# Altium PCB PCB.PcbDoc
Units mm, origin at the board's own origin, x right, y up, seen from the top; angles counter-clockwise.
Board outline 30 x 85 mm, 2 copper layers (Top Layer, Bottom Layer); 18 components, 18 nets, 88 pads, 0 vias.
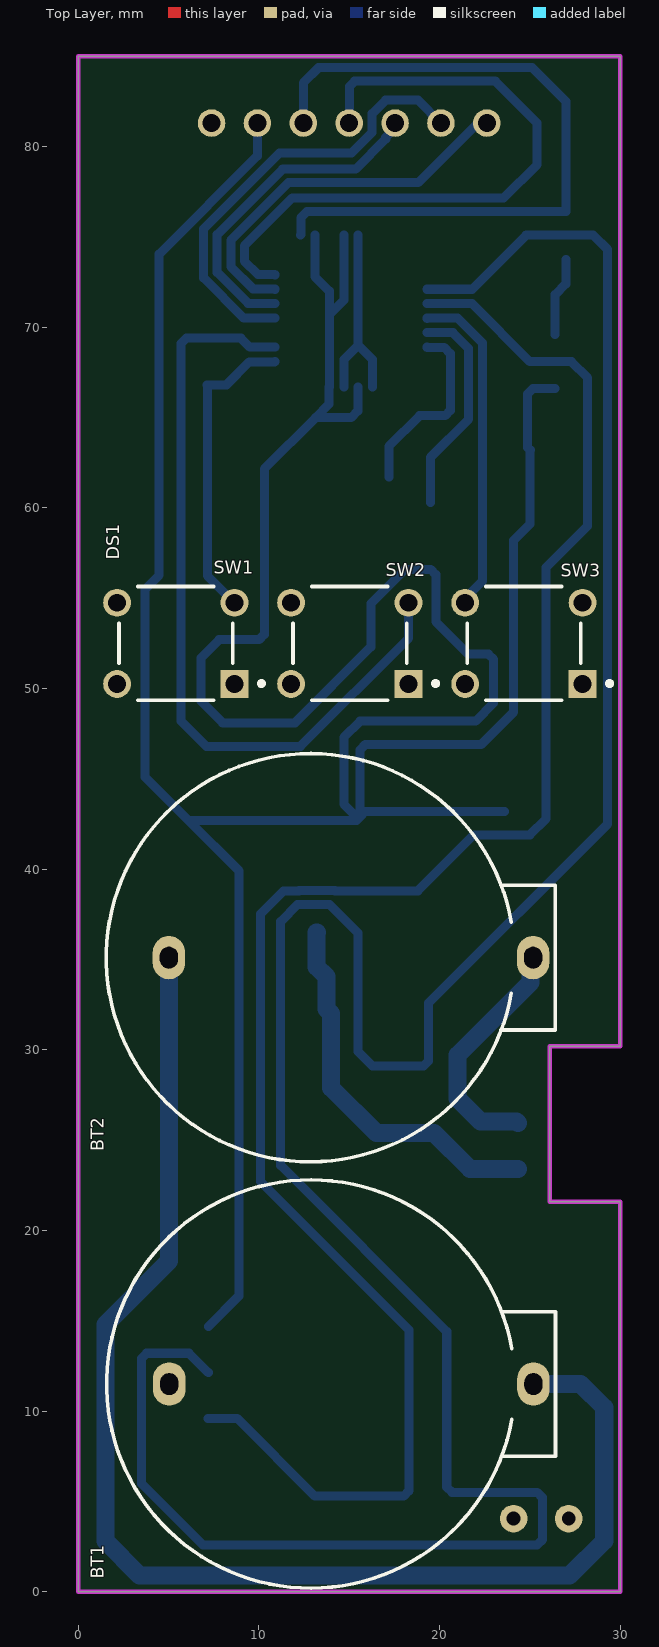
[diagram p0: Top Layer view]
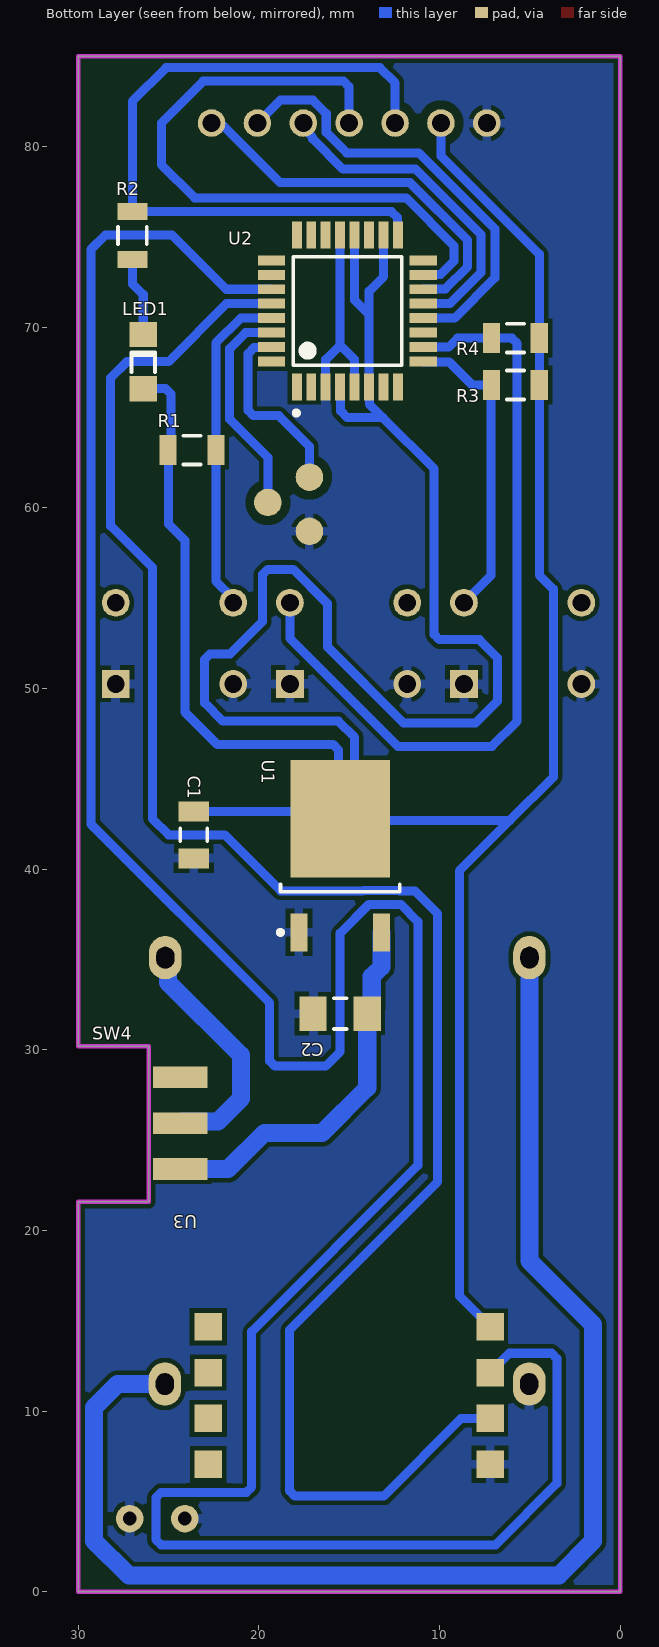
[diagram p1: Bottom Layer view, seen from below]
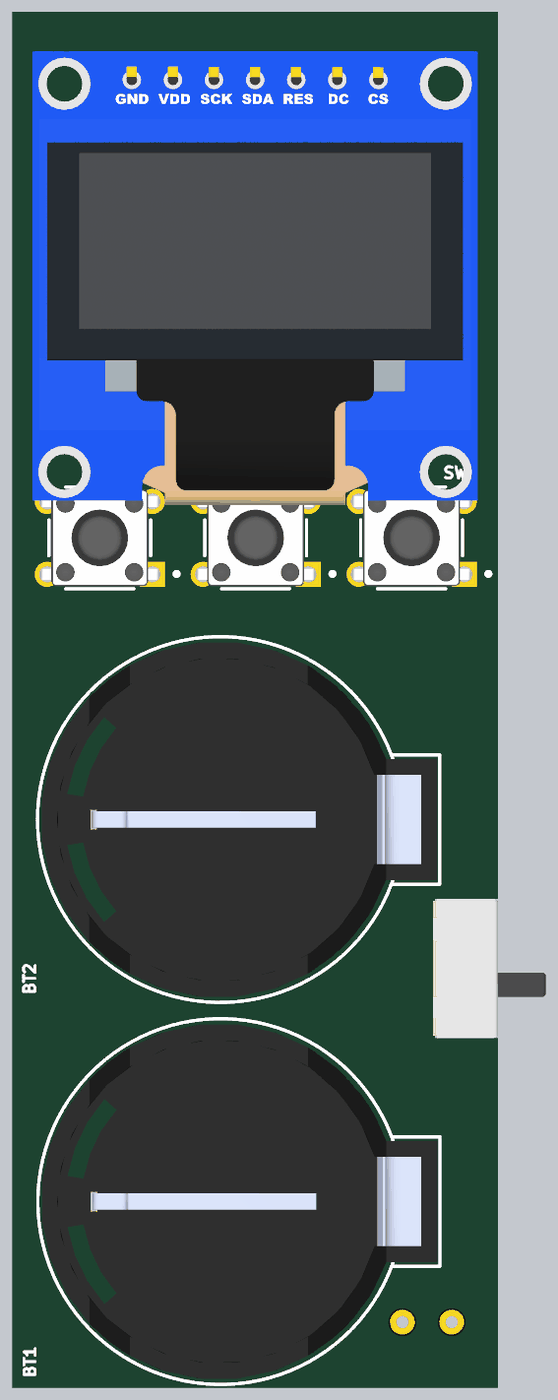
[diagram p2: 3D render of the assembled board from above, using the file's embedded part models]
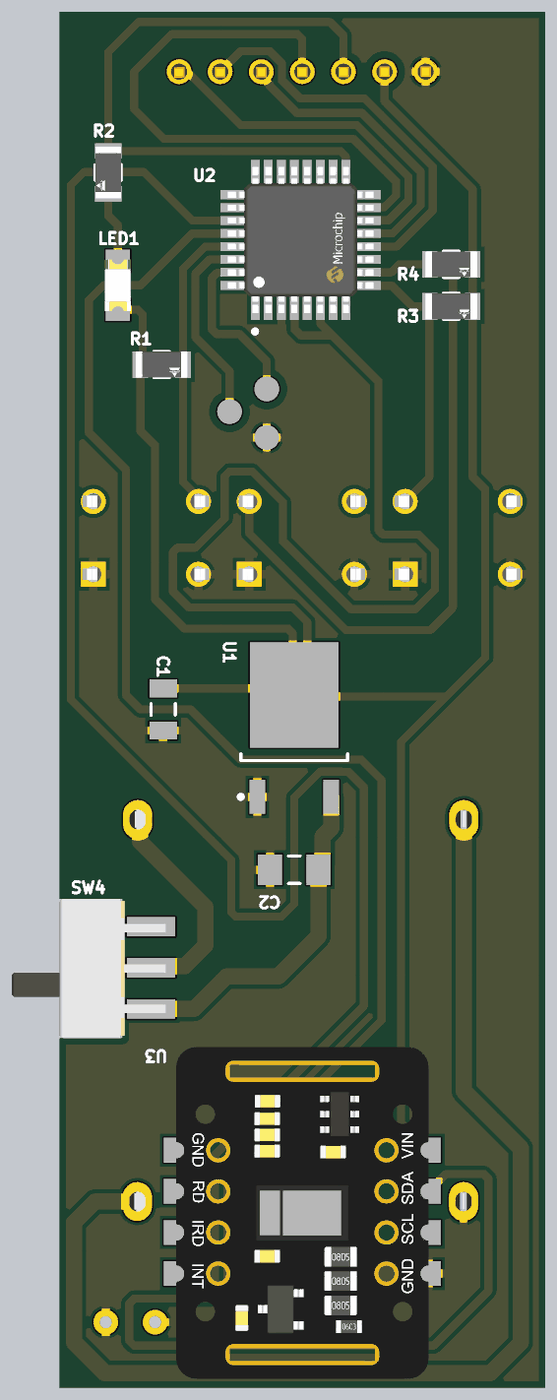
[diagram p3: 3D render of the assembled board from below, using the file's embedded part models]

## Layer stack, top to bottom
Top Solder: solder mask 0.0102, Solder Resist, Dk 3.5
Top Layer: signal copper 0.0356
Dielectric 1: dielectric 0.32, FR-4, Dk 4.8
Bottom Layer: signal copper 0.0356
Bottom Solder: solder mask 0.0102, Solder Resist, Dk 3.5

## Board outline
0,0 0,85 30,85 30,30.2 26.1,30.2 26.1,21.6 30,21.6 30,0

## Design rules (kind name [scope] priority, off if disabled: settings)
Clearance "Increased Clearance" [InPadClass('Increased Clearance')] p1: gap=0.5 ignorepadtopadclearanceinfootprint=TRUE
Clearance [All] p2: gap=0.254 ignorepadtopadclearanceinfootprint=TRUE except(0: Arc-Hole Track-Hole SMDPad-Hole THPad-Hole Via-Hole Fill-Hole Poly-Hole Region-Hole Text-Hole)
PolygonConnect [All] p1: connectstyle=Relief reliefconductorwidth=0.5 reliefentries=4 polygonreliefangle="90 Angle" airgapwidth=0.254
RoutingVias [All] p1: holewidth=0.711 width=1.27 viastyle="Through Hole" minholewidth=0.711 minwidth=1.27 maxholewidth=0.711 maxwidth=1.27
SolderMaskExpansion [All] p1: expansion=0.102 istentingtop=FALSE
Width [All] p1: maxlimit=1 minlimit=0.254 preferedwidth=0.254 minimp=50.000000 maximp=50.000000 favimp=50.000000
30 further rules are at their usual default settings.

## Classes and differential pairs
pad class "Increased Clearance": DS1-2 DS1-3
component class Schemat: BT1 BT2 C1 C2 DS1 LED1 R1 R2 R3 R4 SW1 SW2 SW3 SW4 U1 U2 U3

## Components (designator, comment, footprint, x,y, rotation, side; value= is the part's Value field where it differs from the comment)
BT1 "BAT3volt" BTH2032 12.82,11.5 r180 top locked
BT2 "BAT3volt" BTH2032 12.8,35.1 r180 top locked
C1 "10u" CAPC3216X180X50LL20T25 23.6,41.9 r90 bottom
C2 "100n" CAPC3216X94X50ML20T25 15.5,32 r180 bottom
DS1 "0.96\"_OLED_SPI" "0.96\"_OLED_SPI" 15,81.3 r0 top locked
LED1 "150120BS75000" 1206_A 26.4,68.1 r270 bottom
R1 "10k" FP-CRCW1206-e3-IPC_C 23.7,63.2 r180 bottom
R2 "1.5k" FP-CRCW1206-e3-IPC_C 27,75.074 r270 bottom
R3 "2.7k" FP-CRCW1206-e3-IPC_C 5.8,66.8 r180 bottom
R4 "2.7k" FP-CRCW1206-e3-IPC_C 5.8,69.4 r180 bottom
SW1 "3-1825910-1" FP-3-1825910-1-MFG 5.4,52.5 r180 top locked
SW2 "3-1825910-1" FP-3-1825910-1-MFG 15.035,52.5 r180 top locked
SW3 "3-1825910-1" FP-3-1825910-1-MFG 24.669,52.5 r180 top locked
SW4 "SS12D00_SELECTOR" SS12D00_SELECTOR 28.1,25.9 r0 bottom locked
U1 "LD1117DT33CTR" TO-252_N 15.5,40.75 r90 bottom
U2 "ATmega328P-AU" FP-32A-MFG 15.1,70.9 r90 bottom
U3 "MAX30102_MODULE" MAX30102_MODULE 15,10.8 r180 bottom locked
? "Comment" JUMPER 25.625,4.05 r0 top

## Footprints (in the part's own frame and the unit in brackets; to place one, negate y for a bottom-side part, rotate by r counter-clockwise, add the part's x,y. Pads: shape width x height; smd on the part's side, far side on the other; paste and mask are expansions set on the pad)
"0.96\"_OLED_SPI" [mil]
  round 60 hole 39.37: 1(-300,0) 2(-200,0) 3(-100,0) 4(0,0) 5(100,0) 6(200,0) 7(300,0)
  body extent -542,-1054 542,50, height 327
1206_A [mm] "Chip LED, 2-Leads, Body 3.2x1.6mm, IPC Medium Density"
  rect 1.4x1.5 smd: 1(-1.5,0) 2(1.5,0)
  silkscreen extent -0.5,-0.67 0.6,0.65, body extent -1.6,-0.8 1.6,0.8, height 0.68
BTH2032 [mm] "CR2032 BATTERY HOLDER"
  oval 1.8x2.4 hole 1 slot 1.2 at 90 deg: 1(-12.38,0) 2(7.78,0)
  silkscreen extent -13.6,-11.3 11.25,11.3, body extent -13.45,-11 11.05,11, height 8.5
CAPC3216X94X50ML20T25 [mm] "Chip Capacitor, 2-Leads, Body 3.20x1.60mm, IPC Low Density"
  rect 1.5x1.9 smd: 1(-1.5,0) 2(1.5,0)
  silkscreen extent -0.35,-0.85 0.35,0.85, body extent -1.7,-0.9 1.7,0.9, height 0.94
CAPC3216X180X50LL20T25 [mm] "Chip Capacitor, 2-Leads, Body 3.20x1.60mm, IPC High Density"
  rect 1.1x1.7 smd: 1(-1.3,0) 2(1.3,0)
  silkscreen extent -0.35,-0.75 0.35,0.75, body extent -1.7,-0.9 1.7,0.9, height 1.8
FP-3-1825910-1-MFG [mm]
  rect 1.54x1.54 hole 0.99 paste-1000 mask+0: 1(-3.25,2.25)
  round 1.54 hole 0.99 paste-1000 mask+0: 2(3.25,2.25) 3(-3.25,-2.25) 4(3.25,-2.25)
  silkscreen extent -4.87,-3.15 3.15,3.15, body extent -4.12,-3.24 4.12,3.24, height 0.25
FP-32A-MFG [mm]
  rect 1.5x0.55 smd paste+0 mask+0: 1(-4.2,2.8) 2(-4.2,2) 3(-4.2,1.2) 4(-4.2,0.4) 5(-4.2,-0.4) 6(-4.2,-1.2) 7(-4.2,-2) 8(-4.2,-2.8) 17(4.2,-2.8) 18(4.2,-2) 19(4.2,-1.2) 20(4.2,-0.4) 21(4.2,0.4) 22(4.2,1.2) 23(4.2,2) 24(4.2,2.8)
  rect 0.55x1.5 smd paste+0 mask+0: 9(-2.8,-4.2) 10(-2,-4.2) 11(-1.2,-4.2) 12(-0.4,-4.2) 13(0.4,-4.2) 14(1.2,-4.2) 15(2,-4.2) 16(2.8,-4.2) 25(2.8,4.2) 26(2,4.2) 27(1.2,4.2) 28(0.4,4.2) 29(-0.4,4.2) 30(-1.2,4.2) 31(-2,4.2) 32(-2.8,4.2)
  silkscreen extent -5.77,-3 3,3, body extent -4.51,-4.51 4.51,4.51, height 1.2
FP-CRCW1206-e3-IPC_C [mm]
  rect 0.956x1.658 smd paste+0 mask+0: 1(-1.326,0) 2(1.326,0)
  silkscreen extent -0.47,-0.8 0.47,0.8, body extent -1.6,-0.8 1.6,0.8, height 0.6
JUMPER [mil]
  round 60 hole 30: 1(-60,0) 2(60,0)
MAX30102_MODULE [mm]
  rect 1.524x1.524 smd: 1(-7.8,3.875) 2(-7.8,1.335) 3(-7.8,-1.205) 4(-7.8,-3.745) 5(7.8,3.875) 6(7.8,1.335) 7(7.8,-1.205) 8(7.8,-3.745)
  body extent -7.8,-10.25 7.8,10.25, height 2.5
SS12D00_SELECTOR [mm]
  rect 3x1.2 smd: 1(-3.75,2.5) 2(-3.75,-0.04) 3(-3.75,-2.58)
  body extent -4.65,-4.29 4.85,4.29, height 2
TO-252_N [mm] "D-PAK, 4-Leads, Body 6.1x6.5mm, Pitch 2.28mm, Lead Span 9.7mm, IPC Medium Density"
  rect 2.1x0.95 smd: 1(-4.25,2.28) 3(-4.25,-2.28)
  rect 6.5x5.5 smd: 4(2.05,0)
  silkscreen extent -4.37,-3.3 -1.6,3.43, body extent -2,-3.3 4.2,3.3, height 2.4

## Part data
BT1 BT2: library part BATH_CR2032, "BATTERY HOLDER, CR2032", .=http://www.chila.ir, MANF_P#=-
C1: library part CMP-2000-06013-1, "Chip Capacitor, 10 uF, +/- 10%, 10 V, -55 to 125 degC, 1206 (3216 Metric), RoHS, Tape and Reel", Capacitance=10uF, Case Code - in=1206, Case Code - mm=3216, Case Height=1.6mm, Case Length=3.2mm, Dielectric=X7R, Manufacturer=Kemet, Maximum Operating Temperature=+125C, Minimum Operating Temperature=-55C, Operating Temperature Range=-55Cto+125C, Package / Case=1206(3216metric), Package Description="2-Pin Surface Mount Device, Body 3.2 x 1.6 mm", Temperature Coefficient / Code=+/-15%, Tolerance=10%, Voltage Rating=10V, Brand=Kemet, Case Width=1.6mm, Class=Class1, Datasheet URL=http://www.kemet.com/docfinder?Partnumber=C1206C106K8RACTU, Datasheet Version=02/2016, Dimensions=1.6mmWx3.2mmLx1.6mmH, Dissipation Factor DF=5, Factory Pack Quantity=2000, Manufacturer URL=http://www.kemet.com/, Mounting Technology=SurfaceMount, Package Reference=1206, Packaging=Reel, Product=GeneralTypeMLCCs, Product Category=MultilayerCeramicCapacitorsMLCC-SMD/SMT, RoHS=Details, Series=C1206C, Termination Style=SMD/SMT, Type=SMDMLCCX7R6.3-250VDCCommericalGrade, Voltage Rating DC=10V
C2: library part CMP-2000-05018-1, "Chip Capacitor, Ceramic, 100 nF, 10%, 50 V, 1206, RoHS, Tape and Reel", Capacitance=100nF, Case Size/Dimension=1206, Dielectric=X7R, Manufacturer=AVX, Rated Voltage=50V, Tolerance (%)=±10%, Datasheet URL=http://www.mouser.com/ds/2/40/cauto-360.pdf, Datasheet Version=Sep-14, Manufacturer URL=http://www.avx.com/
DS1: "0.96 inch oled display with SPI interface"
LED1: library part CMP-1426-00015-1, "SMD mono-color Chip LED, WL-SMCW, Blue", Color=Blue, Manufacturer="Wuerth Elektronik", ComponentLink1Description="Manufacturer URL", ComponentLink1URL=http://www.we-online.com, ComponentLink2Description=Datasheet, ComponentLink2URL=http://katalog.we-online.com/led/datasheet/150120BS75000.pdf, PackageReference=1206_A, PartNumber=150120BS75000
R1 R2 R3 R4: library part CMP-2003-04807-2, "RES Thick Film, 10kΩ, 1%, 0.25W, 100ppm/°C, 1206", Case Code (Imperial)=1206, Case Code (Metric)=3216, Max Operating Temperature=155°C, Max Power Dissipation=250mW, Min Operating Temperature=-55°C, Package Quantity=10, Resistance=10kR, Temperature Coefficient=100ppm/°C, Tolerance=1%, Voltage Rating=200V, Case/Package=1206, Composition="Thick Film", Contact Plating=Tin, Depth=1.6mm, Features="Automotive AEC-Q200", Height=0.55mm, Lead Free="Lead Free", Length=3.2mm, Military Standard=Not, Number of Pins=2, Number of Terminations=2, Packaging="Tape and Reel", Power Rating=250mW, Radiation Hardening=No, Termination=SMD/SMT, Voltage Rating (DC)=200V, Weight=0.000353oz, Width=0.063inch, Working Voltage=200V
SW1 SW2 SW3: library part CMP-03407-000001-1, "SWITCH TACTILE SPST-NO 0.05A 24V", Contact Current Rating=50mA, Contact Resistance=100mΩ, Manufacturer="TE Connectivity", Operating Force=160gf, Package=0, Temperature="-35°C to +85°C", Temperature Range High=+85°C, Temperature Range Low=-35°C, Automotive=No, Category=Switch, ComponentLink2Description=Datasheet, ComponentLink2URL=https://www.te.com/commerce/DocumentDelivery/DDEController?Action=srchrtrv&DocNm=1825910&DocType=Customer+Drawing&DocLang=English, Device Class L1=Electromechanical, Device Class L2=Switches, Device Class L3="Tactile Switches", Digikey Description="SWITCH TACTILE SPST-NO 0.05A 24V", Electromechanical Life=100000Cycles, Height=17.3mm, Lead Free=Yes, Manufacturer Part Number=3-1825910-1, Mount="Through Hole", Octopart=https://octopart.com/3-1825910-1-te+connectivity-46506874, RoHS=TRUE, Throw Configuration=SPST-NO
SW4: "3.5 x 8.6 mm selector switch"
U1: library part CMP-0244-00089-1, "Fixed Low Drop Positive Voltage Regulator, 3.3V, 3-Pin DPAK, Tape and Reel", ComponentLink1Description="Manufacturer URL", ComponentLink1URL=http://www.st.com, ComponentLink2Description=Datasheet, ComponentLink2URL=http://www.st.com/internet/com/TECHNICAL_RESOURCES/TECHNICAL_LITERATURE/DATASHEET/CD00000544.pdf, DatasheetVersion=1/11/2011, PackageDescription="3-Pin Transistor Outline Package 2.28 mm Pitch, 9.7 mm Lead Span (DPAK)", PackageReference=TO-252, PackageVersion=2011
U2: library part CMP-06276-000013-1, "IC MCU 8BIT 32KB FLASH 32TQFP", Frequency=20MHz, Manufacturer=Microchip, Max Supply Voltage=5.5V, Min Supply Voltage=1.8V, Nominal Supply Current=0.04-5.2mA, Package=32A, Temperature="-40°C to +85°C", Temperature Range High=+85°C, Temperature Range Low=-40°C, Automotive=No, Category=IC, ComponentLink2Description=Datasheet, ComponentLink2URL=http://ww1.microchip.com/downloads/en/DeviceDoc/ATmega48A-PA-88A-PA-168A-PA-328-P-DS-DS40002061A.pdf, Core Architecture=AVR, Data Bus Width=8bits, Device Class L1="Integrated Circuits (ICs)", Device Class L2="Embedded Processors and Controllers", Device Class L3=Microcontrollers, Digikey Description="IC MCU 8BIT 32KB FLASH 32TQFP", Footprint Url=http://ww1.microchip.com/downloads/en/appnotes/atmel-8826-seeprom-pcb-mounting-guidelines-surface-mount-packages-applicationnote.pdf, Height=1.2mm, Interface=I2C,SPI,UART,USART,2-Wire, Ipc Land Pattern Name=QFP80P900X900X120-32, Lead Free=Yes, Manufacturer Part Number=ATmega328P-AU, Memory Size=32KBytes, Memory Type=FLASH, Mouser Description="ATmega Series 32 KB Flash 2 KB SRAM 20 MHz 8-Bit Microcontroller - TQFP-32", Number Of A/D Converters=1, Number Of Adc Channels=8, Number Of Cores=1, Number Of I2C Channels=1, Number Of I/Os=23, Number Of Pwm Channels=6, Number Of Spi Channels=1, Number Of Timers/Counters=3, Number Of Uart Channels=1, Octopart=https://octopart.com/atmega328p-au-microchip-77760215, Ram Size=2KBytes, RoHS=TRUE, Standoff Height=0.05mm
U3: "Arduino module for MAX30102 pulseoxymeter sensor"

## Free pads (board coordinates)
  round 1.524 smd far side: 2(19.5,60.3) 3(17.2,61.7) 4(17.2,58.7)

## Nets (pads, with @x,y where several pads share a name; then routed paths per layer and width w, separated by ;. In a path a pad name is that pad's centre, name@x,y a point inside that pad or via, vN(x,y) a via of type N, cw(c..) or ccw(c..) an arc to the next point about the centre after c; other vN are vias at no path point)
GND: ?.1 ?.2 BT1.2 C1.1 C2.1 DS1.1 pad.4 SW1.1 SW1.2 SW2.1 SW2.2 SW3.1 SW3.2 U1.1 U2.3 U2.5 U2.21 U3.8 | length 12.2
  Bottom Layer w0.254: SW1.2@2.15,50.15 SW1.2 ; BT1.2 BT1.2@5.561,10.979
  Bottom Layer w0.5: U2.5 14.7,68.2 15.5,69 ; U2.21 15.5,69 ; U2.3 16.3,68.2 15.5,69
NetBT1_1: BT1.1 BT2.2 | length 74.8
  Bottom Layer w1: BT2.2 5.02,18.32 1.5,14.8 1.5,2.8 3.4,0.9 27.2,0.9 29.119,2.819 29.119,10.195 27.814,11.5 BT1.1
NetBT2_1: BT2.1 SW4.2 | length 13.4
  Bottom Layer w1: SW4.2 24.25,26.04 22.26,26.04 21,27.3 21,29.7 25.027,33.727 25.027,34.947 BT2.1
NetC2_2: C2.2 SW4.1 U1.3 | length 21.2
  Bottom Layer w1: U1.3 13.2,36.48 13.2,34.6 13.75,34.05 13.75,32.25 C2.2 14,27.9 16.5,25.4 19.7,25.4 21.7,23.4 SW4.1
NetDS1_3: DS1.3 R2.1 U2.17 | length 39.3
  Bottom Layer w0.5: U2.17 12.321,75.121 12.321,76.059 12.662,76.4 R2.1 27,82.5 25.131,84.369 13.3,84.369 12.46,83.529 DS1.3@12.46,81.8
NetDS1_4: DS1.4 U2.15 | length 36.2
  Bottom Layer w0.5: U2.15 10.879,72.921 9.941,72.921 9.2,73.662 9.2,74.5 11.854,77.154 23.554,77.154 25.4,79 25.4,81.3 23.085,83.615 15.305,83.615 15.012,83.322 15.012,81.812 DS1.4@15,81.8
NetDS1_5: DS1.5 U2.13 | length 18.6
  Bottom Layer w0.5: U2.13 10.879,71.321 9.409,71.321 7.692,73.038 7.692,75.125 11.321,78.754 15.354,78.754 17.024,80.424 17.024,80.507 17.54,81.023 DS1.5
NetDS1_6: DS1.6 U2.12 | length 24.8
  Bottom Layer w0.5: U2.12 9.163,70.5 6.938,72.725 6.938,75.437 11.151,79.65 15.14,79.65 16.27,80.78 16.27,81.82 17.016,82.566 18.814,82.566 DS1.6
NetDS1_7: DS1.7 U2.14 | length 21.5
  Bottom Layer w0.5: U2.14 10.879,72.121 9.675,72.121 8.446,73.35 8.446,74.812 11.634,78 18.82,78 DS1.7@22.62,81.8
NetLED1_1: LED1.1 R2.2 | length 4.4
  Bottom Layer w0.5: LED1.1 26.4,71.8 27,72.4 R2.2
NetR1_2: R1.2 SW3.4 U2.29 | length 18.4
  Bottom Layer w0.5: U2.29@19.321,70.479 U2.29 21,70.5 22.374,69.126 R1.2 22.374,55.945 21.419,54.99 SW3.4
NetR3_1: R3.1 SW1.3 U2.9 | length 17
  Bottom Layer w0.5: SW1.3 7.154,56.246 7.154,66.772 R3.1 8.2,66.8 9.475,68.075 10.875,68.075 U2.9
NetR4_1: R4.1 SW2.3 U2.10 | length 44
  Bottom Layer w0.5: U2.10 9.5,68.9 9,69.4 5.993,69.4 5.7,69.107 5.7,48.2 7.1,46.8 12.3,46.8 18.285,52.785 SW2.3
NetU2_27: U2.27 U3.6 | length 154.7
  Bottom Layer w0.5: U3.6 6.131,13.204 3.793,13.204 3.5,12.911 3.5,6 6.9,2.6 25.407,2.6 25.7,2.893 25.7,5.207 25.407,5.5 20.693,5.5 20.4,5.793 20.4,14.4 11.2,23.6 11.2,37.1 12.146,38.046 12.528,38.046 12.536,38.054 13.904,38.054 15.5,36.458 15.5,29.9 16.3,29.1 19.107,29.1 19.4,29.393 19.4,32.6 29.3,42.5 29.3,74.3 28.5,75.1 24.8,75.1 21.8,72.1 U2.27
NetU2_28: U2.28 U3.7 | length 102.3
  Bottom Layer w0.5: U3.7@7.195,9.6 8.8,9.6 13.1,5.3 18.007,5.3 18.3,5.593 18.3,14.5 10.1,22.7 10.1,37.531 11.369,38.8 12.216,38.8 12.224,38.808 14.216,38.808 14.224,38.8 18.8,38.8 21.9,41.9 25,41.9 25.9,42.8 25.9,56.7 28.2,59 28.2,67.2 27.3,68.1 25,68.1 21.8,71.3 U2.28
RX: pad.2 U2.30 | length 12.1
  Bottom Layer w0.5: U2.30 20.734,69.7 21.617,68.817 21.617,64.917 19.5,62.8 pad.2
TX: pad.3 U2.31 | length 10.5
  Bottom Layer w0.5: pad.3 17.2,63.4 18.9,65.1 20.307,65.1 20.6,65.393 20.6,68.538 20.259,68.879 19.321,68.879 U2.31
VCC: C1.2 DS1.2 LED1.2 R1.1 R3.2 R4.2 U1.4 U2.4 U2.6 U2.18 U2.20 U3.5 | length 203
  Bottom Layer w0.5: U3.5 8.9,16.375 8.9,39.9 6.1,42.7 ; DS1.2 9.92,79.485 4.474,74.039 R4.2 R3.2 4.474,56.274 3.7,55.5 3.7,45.1 6.1,42.7 ; U2.18 13.1,72.8 13.9,72 13.9,70.7 ; U2.20 14.7,71.5 13.9,70.7 ; U2.4 15.479,66.679 15.479,65.372 15.107,65 13.138,65 ; C1.2 15.9,43.2 U1.4@15.6,42.9 ; LED1.2 25.167,66.6 24.874,66.307 24.874,63.352 R1.1 25,63.174 25,59.1 24.1,58.2 24.1,48.7 22.3,46.9 15.893,46.9 15.6,46.607 U1.4@15.6,42.9 ; 6.1,42.7 6.102,42.702 11.698,42.702 11.7,42.7 15.4,42.7 U1.4 ; 13.138,65 13.879,65.741 13.879,66.679 U2.6 13.9,70.7 ; 13.138,65 10.3,62.162 10.3,52.993 10.007,52.7 7.8,52.7 6.8,51.7 6.8,49.3 8,48.1 12,48.1 16.2,52.3 16.2,54.7 18.1,56.6 19.507,56.6 19.8,56.307 19.8,53.7 21.6,51.9 22.707,51.9 23,51.607 23,49.2 22,48.2 15.6,48.2 14.7,47.3 14.7,43.6 U1.4 ; U1.4 U1.4@15.6,42.9
pads on no net: SW1.4 SW2.4 SW3.3 SW4.3 U2.1 U2.2 U2.7 U2.8 U2.11 U2.16 U2.19 U2.22 U2.23 U2.24 U2.25 U2.26 U2.32 U3.1 U3.2 U3.3 U3.4

## Polygon pours and split planes (outlines as drawn)
GND on Bottom Layer "GND_L02_P000" (solid, remove dead copper, pour order 0): 29.925,30.2 26.025,30.2 26.025,21.6 29.925,21.6 29.925,0 -0.075,0 -0.075,85 29.925,85

## Keep-outs
Keep-Out Layer:
  the board outline again, w0.254